# Altium PCB PCB1.PcbDoc
Units mm, origin at the board's own origin, x right, y up, seen from the top; angles counter-clockwise.
Board outline 152.4 x 101.6 mm, 2 copper layers (Top Layer, Bottom Layer); 32 components, 15 nets, 64 pads, 0 vias.
Unrouted connection lines stored in the file: 49.
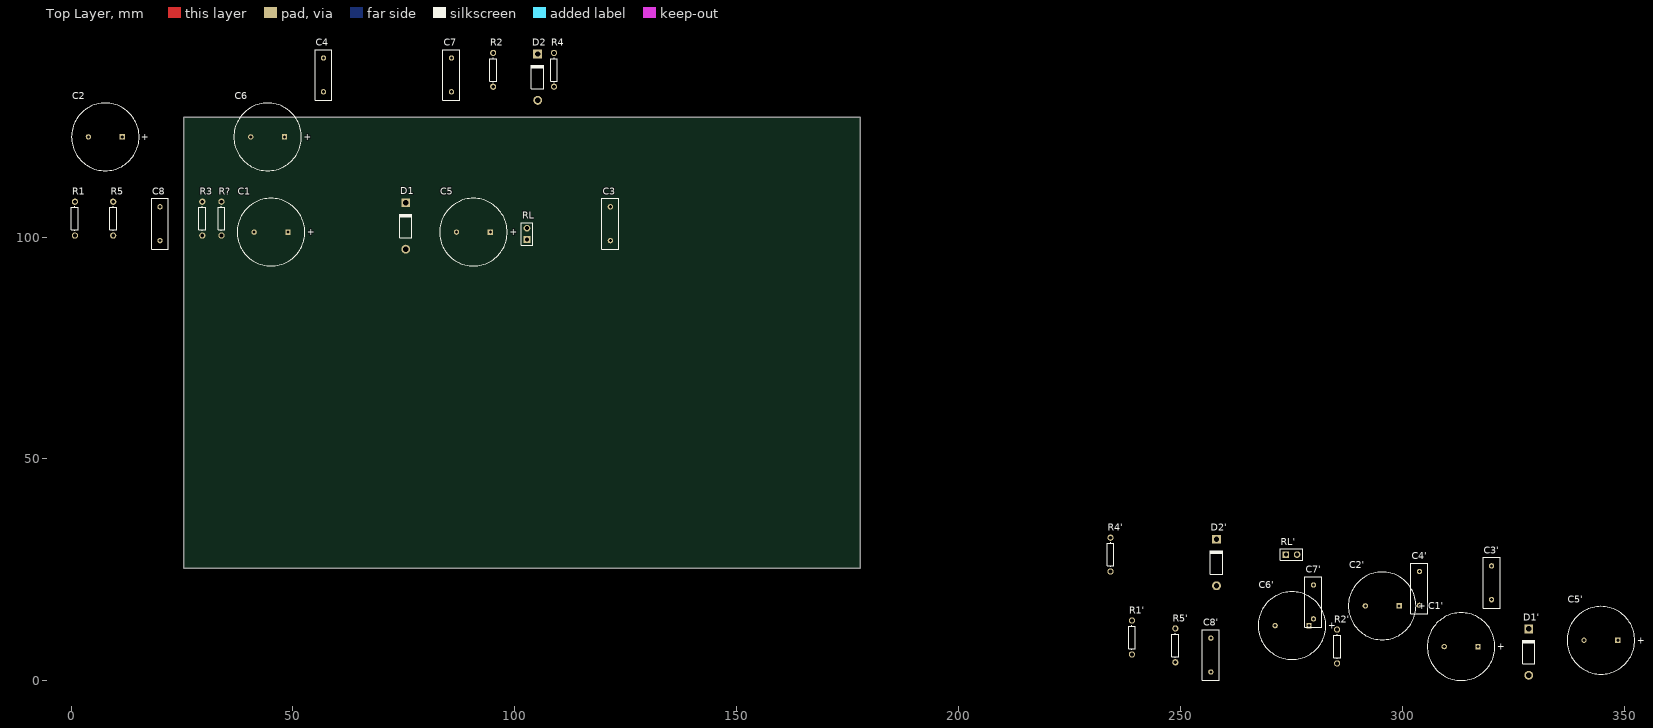
[diagram p0: Top Layer view]
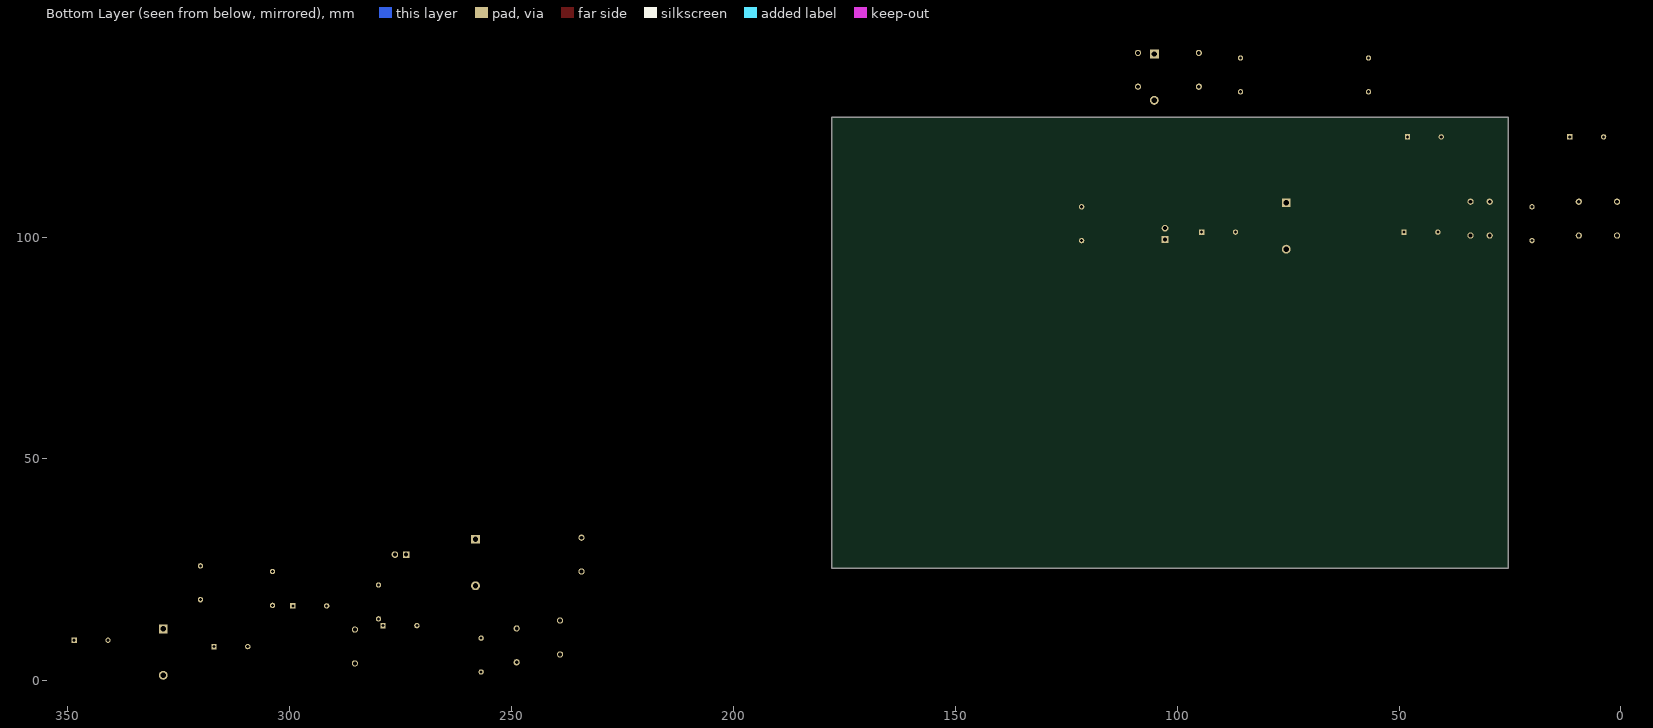
[diagram p1: Bottom Layer view, seen from below]

## Layer stack, top to bottom
Top Solder: solder mask 0.0102, Solder Resist, Dk 3.5
Top Layer: signal copper 0.0356
Dielectric 1: dielectric 0.32, FR-4, Dk 4.8
Bottom Layer: signal copper 0.0356
Bottom Solder: solder mask 0.0102, Solder Resist, Dk 3.5

## Board outline
25.4,25.4 177.8,25.4 177.8,127 25.4,127

## Design rules (kind name [scope] priority, off if disabled: settings)
Clearance [All] p1: gap=0.254 ignorepadtopadclearanceinfootprint=FALSE except(0: Arc-Hole Track-Hole SMDPad-Hole THPad-Hole Via-Hole Fill-Hole Poly-Hole Region-Hole Text-Hole)
PolygonConnect [All] p1: connectstyle=Relief reliefconductorwidth=0.254 reliefentries=4 polygonreliefangle="90 Angle" airgapwidth=0.254
RoutingVias [All] p1: holewidth=0.711 width=1.27 viastyle="Through Hole" minholewidth=0.711 minwidth=1.27 maxholewidth=0.711 maxwidth=1.27
SolderMaskExpansion [All] p1: expansion=0.102 istentingtop=FALSE
Width [All] p1: maxlimit=0.254 minlimit=0.254 preferedwidth=0.254
30 further rules are at their usual default settings.

## Components (designator, comment, footprint, x,y, rotation, side; value= is the part's Value field where it differs from the comment)
C1 "Cap Pol1" RB7.6-15 45.058,101.092 r0 top value=1uF
C1' "Cap Pol1" RB7.6-15 313.182,7.72 r0 top value=1uF
C2 "Cap Pol1" RB7.6-15 7.72,122.555 r0 top value=22uF
C2' "Cap Pol1" RB7.6-15 295.402,16.891 r0 top value=22uF
C3 "Cap" RAD-0.3 121.512,102.997 r90 top value=100nF
C3' "Cap" RAD-0.3 320.04,22.098 r90 top value=100nF
C4 "Cap" RAD-0.3 56.869,136.525 r90 top value=100nF
C4' "Cap" RAD-0.3 303.784,20.828 r90 top value=100nF
C5 "Cap Pol1" RB7.6-15 90.651,101.092 r0 top value=100uF
C5' "Cap Pol1" RB7.6-15 344.678,9.144 r0 top value=100uF
C6 "Cap Pol1" RB7.6-15 44.296,122.555 r0 top value=100uF
C6' "Cap Pol1" RB7.6-15 275.082,12.446 r0 top value=100uF
C7 "Cap" RAD-0.3 85.698,136.525 r90 top value=220nF
C7' "Cap" RAD-0.3 279.908,17.78 r90 top value=220nF
C8 "Cap" RAD-0.3 20.039,102.997 r90 top value=100pF
C8' "Cap" RAD-0.3 256.794,5.815 r90 top value=100pF
D1 "1N4001" DO-41 75.411,102.489 r90 top
D1' "1N4001" DO-41 328.422,6.477 r90 top
D2 "1N4001" DO-41 105.129,136.017 r90 top
D2' "1N4001" DO-41 258.064,26.67 r90 top
R1 "Res1" AXIAL-0.3 0.862,104.14 r90 top value=22K
R1' "Res1" AXIAL-0.3 239.014,9.779 r90 top value=22K
R2 "Res1" AXIAL-0.3 95.096,137.668 r90 top value=680
R2' "Res1" AXIAL-0.3 285.242,7.747 r90 top value=680
R3 "Res1" AXIAL-0.3 29.564,104.14 r90 top value=22k
R4 "Res1" AXIAL-0.3 108.812,137.668 r90 top value=1
R4' "Res1" AXIAL-0.3 234.188,28.448 r90 top value=1
R5 "Res1" AXIAL-0.3 9.498,104.14 r90 top value=1K
R5' "Res1" AXIAL-0.3 248.793,8.001 r90 top value=1K
R? "Res1" AXIAL-0.3 33.882,104.14 r90 top value=22k
RL "Header 2" HDR1X2 102.716,99.441 r90 top
RL' "Header 2" HDR1X2 273.685,28.448 r0 top

## Footprints (in the part's own frame and the unit in brackets; to place one, negate y for a bottom-side part, rotate by r counter-clockwise, add the part's x,y. Pads: shape width x height; smd on the part's side, far side on the other; paste and mask are expansions set on the pad)
AXIAL-0.3 [mm] "Axial Device, Thru-Hole; 2 Leads; 0.3 in Pin Spacing"
  round 1.4 hole 0.85: 1(-3.81,0) 2(3.81,0)
  silkscreen extent -2.77,-0.76 2.77,0.76
DO-41 [mm] "Diode, Axial; Body 5.2 x 2.7 mm (LxDia. max), Lead Dia. 0.86 mm (max)"
  round 2 hole 1.2: 1(-5.23,0)
  rect 2x2 hole 1.2: 2(5.23,0)
  silkscreen extent -2.65,-1.4 2.75,1.4
HDR1X2 [mm] "Connector; Header; 2 Position"
  rect 1.5x1.5 hole 0.9: 1(0,0)
  round 1.5 hole 0.9: 2(2.54,0)
  silkscreen extent -1.27,-1.27 3.81,1.27
RAD-0.3 [mm] "Radial Cap, Thru-Hole; 2 Leads; 0.3 in Pin Spacing"
  round 1.2 hole 0.7: 1(-3.81,0) 2(3.81,0)
  silkscreen extent -5.71,-1.91 5.71,1.91
RB7.6-15 [mm] "Polarized Capacitor (Radial); 2 Leads"
  rect 1.2x1.2 hole 0.7: 1(3.81,0)
  round 1.2 hole 0.7: 2(-3.81,0)
  silkscreen extent -7.62,-7.62 7.62,7.62

## Part data
C1 C1' C2 C2' C5 C5' C6 C6': "Polarized Capacitor (Radial)", LatestRevisionDate=17-Jul-2002, LatestRevisionNote="Re-released for DXP Platform.", PackageDescription="Polarized Capacitor (Radial); 2 Leads", PackageReference=RB7.6-15, Published=8-Jun-2000, Publisher="Altium Limited"
C3 C3' C4 C4' C7 C7' C8 C8': "Capacitor", LatestRevisionDate=17-Jul-2002, LatestRevisionNote="Re-released for DXP Platform.", PackageDescription="Radial Cap, Thru-Hole; 2 Leads; 0.3 in Pin Spacing", PackageReference=RAD-0.3, Published=8-Jun-2000, Publisher="Altium Limited"
D1 D1' D2 D2': library part "Diode 1N4001", "1 Amp General Purpose Rectifier", Code_JEDEC=DO-204-AL, ComponentLink1Description="Manufacturer Link", ComponentLink1URL=http://www.fairchildsemi.com/, ComponentLink2Description=Datasheet, ComponentLink2URL=http://www.fairchildsemi.com/ds/1N%2F1N4001.pdf, DatasheetVersion=1998, LatestRevisionDate=17-Jul-2002, LatestRevisionNote="Re-released for DXP Platform.", PackageDescription="Diode, Axial; Body 5.2 x 2.7 mm (LxDia. max), Lead Dia. 0.86 mm (max)", PackageReference=DO-41, PackageVersion=Aug-1999, Published=8-Jun-2000, Publisher="Altium Limited"
R1 R1' R2 R2' R3 R4 R4' R5 R5' R?: "Resistor", LatestRevisionDate=17-Jul-2002, LatestRevisionNote="Re-released for DXP Platform.", PackageDescription="Axial Device, Thru-Hole; 2 Leads; 0.3 in Pin Spacing", PackageReference=AXIAL-0.3, Published=8-Jun-2000, Publisher="Altium Limited"
RL RL': "Header, 2-Pin", LatestRevisionDate=17-Jul-2002, LatestRevisionNote="Re-released for DXP Platform.", Publisher="Altium Limited"

## Nets (pads, with @x,y where several pads share a name; then routed paths per layer and width w, separated by ;. In a path a pad name is that pad's centre, name@x,y a point inside that pad or via, vN(x,y) a via of type N, cw(c..) or ccw(c..) an arc to the next point about the centre after c; other vN are vias at no path point)
+Vs: C3'.2 C3.2 C5'.1 C5.1 D1'.2 D1.2
-Vs: C2'.2 C2.2 C3'.1 C3.1 C4'.1 C4'.2 C4.1 C4.2 C5'.2 C5.2 C6'.1 C6'.2 C6.1 C6.2 C7'.1 C7.1 D2'.1 D2.1 R3.1 R?.1 RL'.2 RL.2
Net*?_1: C1'.2 R?.2
Net*?_2: R1'.2 R2'.2 R5'.2
Net*?_4: C8'.1 D1'.1 D2'.2 R1'.1 R4'.2 RL'.1
Net*_1: C1.2 R3.2
Net*_2: R1.2 R2.2 R5.2
Net*_4: C8.1 D1.1 D2.2 R1.1 R4.2 RL.1
NetC2'_1: C2'.1 R2'.1
NetC2_1: C2.1 R2.1
NetC7'_2: C7'.2 R4'.1
NetC7_2: C7.2 R4.1
NetC8'_2: C8'.2 R5'.1
NetC8_2: C8.2 R5.1
Vi: C1'.1 C1.1

## Text inside footprints (layer, text, board x,y; h text height)
C1: Top Overlay "+" at 53.19,100.355 h1.5
C1': Top Overlay "+" at 321.314,6.983 h1.5
C2: Top Overlay "+" at 15.852,121.818 h1.5
C2': Top Overlay "+" at 303.534,16.154 h1.5
C5: Top Overlay "+" at 98.783,100.355 h1.5
C5': Top Overlay "+" at 352.81,8.407 h1.5
C6: Top Overlay "+" at 52.428,121.818 h1.5
C6': Top Overlay "+" at 283.214,11.709 h1.5